# Altium PCB StepperMotorDriver.PcbDoc
Units mil, origin at the board's own origin, x right, y up, seen from the top; angles counter-clockwise.
Board outline 6000 x 4000 mil, 2 copper layers (Top Layer, Bottom Layer); 157 components, 124 nets, 514 pads, 4 vias.
Unrouted connection lines stored in the file: 335.
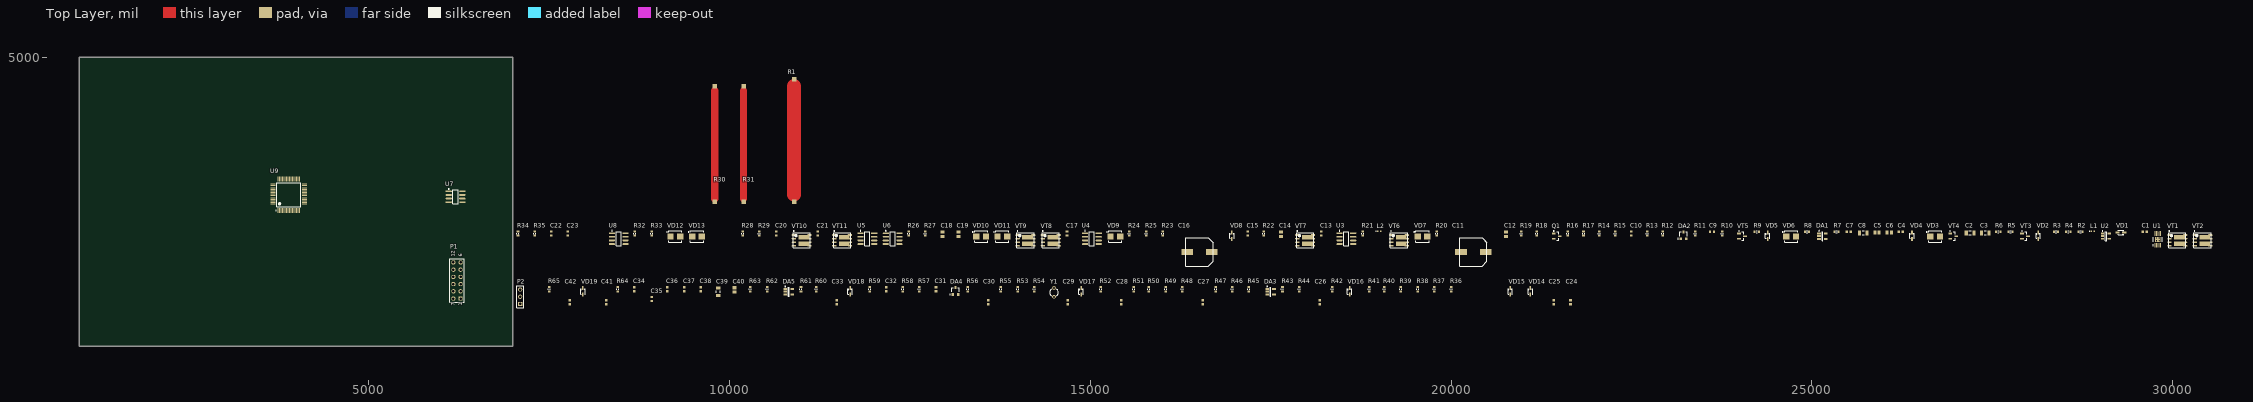
[diagram p0: Top Layer view]
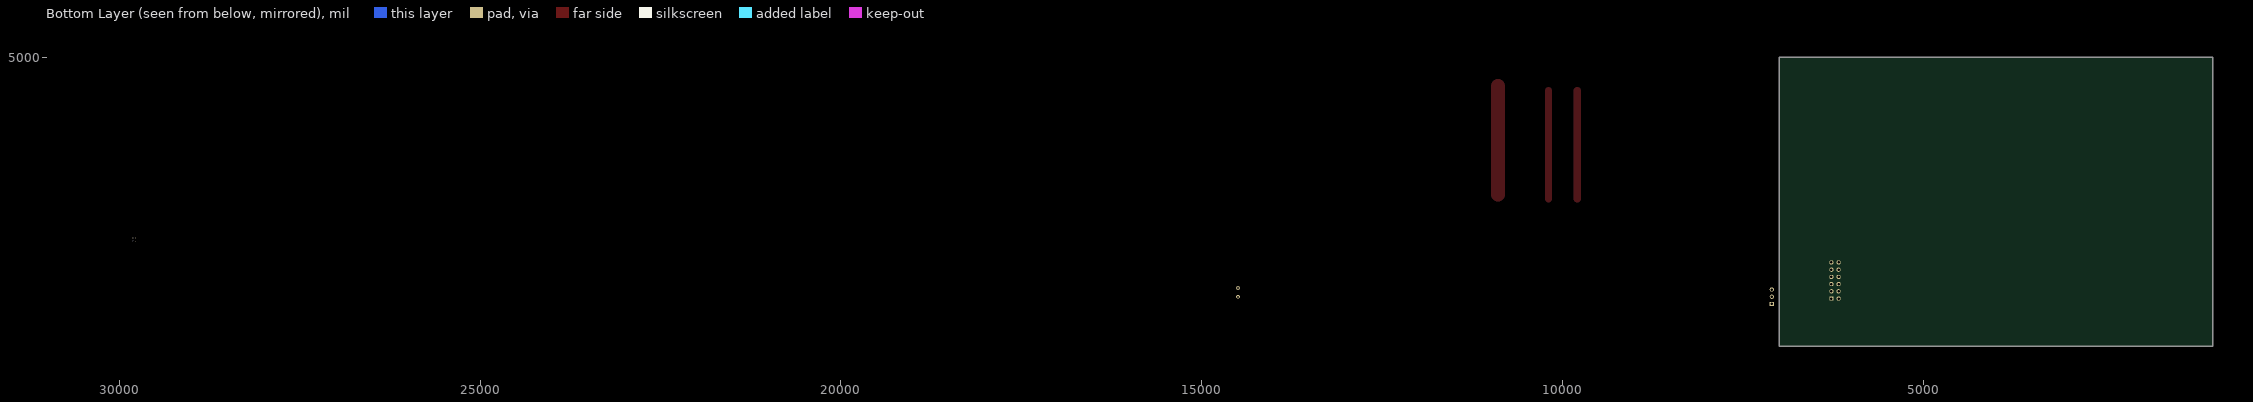
[diagram p1: Bottom Layer view, seen from below]

## Layer stack, top to bottom
Top Solder: solder mask 0.4, Solder Resist, Dk 3.5
Top Layer: signal copper 1.4
Dielectric 1: dielectric 12.6, FR-4, Dk 4.8
Bottom Layer: signal copper 1.4
Bottom Solder: solder mask 0.4, Solder Resist, Dk 3.5

## Board outline
1000,1000 7000,1000 7000,5000 1000,5000

## Design rules (kind name [scope] priority, off if disabled: settings)
Clearance [All] p1: gap=10
PolygonConnect [All] p1: connectstyle=Relief reliefconductorwidth=10 reliefentries=4 polygonreliefangle="90 Angle" airgapwidth=10
RoutingVias [All] p1: holewidth=28 width=50 viastyle="Through Hole" minholewidth=28 minwidth=50 maxholewidth=28 maxwidth=50
SolderMaskExpansion [All] p1: expansion=4
Width [All] p1: maxlimit=10 minlimit=10 preferedwidth=10
29 further rules are at their usual default settings.

## Classes and differential pairs
component class Designator: C1 C2 C3 C4 C5 C6 C7 C8 C9 C10 C11 C12 C13 C14 C15 C16 C17 C18 C19 C20 C21 C22 C23 DA1 DA2 L1 L2 Q1 R1 R2 R3 R4 R5 R6 R7 R8 R9 R10 R11 R12 R13 R14 R15 R16 R17 R18 R19 R20 R21 R22 R23 R24 R25 R26 R27 R28 R29 R30 R31 R32 R33 R34 R35 U1 U2 U3 U4 U5 U6 U7 U8 VD1 VD2 VD3 VD4 VD5 VD6 VD7 VD8 VD9 VD10 VD11 VD12 VD13 VT1 VT2 VT3 VT4 VT5 VT6 VT7 VT8 VT9 VT10 VT11

## Components (designator, comment, footprint, x,y, rotation, side; value= is the part's Value field where it differs from the comment)
C1 "Capacitor" 1608[0603] 29610,2585 r0 top
C2 "Capacitor" C1206 27190,2570 r0 top
C3 "Capacitor" C1206 27400,2570 r0 top
C4 "Capacitor" 1608[0603] 26230,2585 r0 top
C5 "Capacitor" C0805 25900,2575 r0 top
C6 "Capacitor" C0805 26070,2575 r0 top
C7 "Capacitor" 1608[0603] 25510,2585 r0 top
C8 "Capacitor" C1206 25710,2570 r0 top
C9 "Capacitor" 1608[0603] 23615,2585 r0 top
C10 "Capacitor" 1608[0603] 22495,2560 r90 top
C11 "47uF 63V" 10x10.5 20310,2305 r0 top
C12 "Capacitor" C0805 20760,2550 r90 top
C13 "Capacitor" 1608[0603] 18205,2560 r90 top
C14 "Capacitor" C0805 17645,2550 r90 top
C15 "Capacitor" 1608[0603] 17185,2560 r90 top
C16 "47uF 63V" 10x10.5 16515,2305 r0 top
C17 "Capacitor" 1608[0603] 14680,2560 r90 top
C18 "Capacitor" C0805 12955,2550 r90 top
C19 "Capacitor" C0805 13175,2550 r90 top
C20 "Capacitor" 1608[0603] 10650,2560 r90 top
C21 "Capacitor" 1608[0603] 11230,2560 r90 top
C22 "Capacitor" 1608[0603] 7535,2560 r90 top
C23 "Capacitor" 1608[0603] 7765,2560 r90 top
C24 "Capacitor" 1608[0603] 21655,1610 r90 top
C25 "Capacitor" 1608[0603] 21425,1610 r90 top
C26 "Capacitor" 1608[0603] 18180,1610 r90 top
C27 "Capacitor" 1608[0603] 16560,1610 r90 top
C28 "Capacitor" 1608[0603] 15430,1610 r90 top
C29 "Capacitor" 1608[0603] 14690,1610 r90 top
C30 "Capacitor" 1608[0603] 13590,1610 r90 top
C31 "Capacitor" 1608[0603] 12865,1790 r90 top
C32 "Capacitor" 1608[0603] 12175,1790 r90 top
C33 "Capacitor" 1608[0603] 11490,1610 r90 top
C34 "Capacitor" 1608[0603] 8685,1790 r90 top
C35 "Capacitor" 1608[0603] 8930,1655 r90 top
C36 "Capacitor" 1608[0603] 9145,1790 r90 top
C37 "Capacitor" 1608[0603] 9375,1790 r90 top
C38 "Capacitor" 1608[0603] 9605,1790 r90 top
C39 "Capacitor" C1206 9850,1755 r90 top
C40 "Capacitor" C0805 10075,1780 r90 top
C41 "Capacitor" 1608[0603] 8300,1610 r90 top
C42 "Capacitor" 1608[0603] 7790,1610 r90 top
DA1 "LMV611MF" MF05A_M 25145,2525 r0 top
DA2 "TLV809" SOT23 23220,2535 r0 top
DA3 "LMV611MF" MF05A_M 17500,1755 r0 top
DA4 "TLV809" SOT23 13135,1765 r0 top
DA5 "LMV611MF" MF05A_M 10825,1755 r0 top
L1 "Inductor" 0402-A 28890,2590 r0 top
L2 "Inductor" 0402-A 19005,2590 r0 top
P1 "Header 6X2A" HDR2X6_CEN 6280,1660 r90 top
P2 "Header 3" HDR1X3 7105,1585 r90 top
Q1 "2N7002" SOT23_N 21465,2525 r0 top
R1 "Resistor" Res12mOhm 10900,3200 r90 top
R2 "Resistor" J1-0603 28720,2585 r0 top
R3 "Resistor" J1-0603 28380,2585 r0 top
R4 "Resistor" J1-0603 28550,2585 r0 top
R5 "Resistor" J1-0603 27750,2585 r0 top
R6 "Resistor" J1-0603 27580,2585 r0 top
R7 "Resistor" J1-0603 25340,2585 r0 top
R8 "Resistor" J1-0603 24930,2585 r0 top
R9 "Resistor" J1-0603 24235,2585 r0 top
R10 "Resistor" J1-0603 23755,2560 r90 top
R11 "Resistor" J1-0603 23385,2560 r90 top
R12 "Resistor" J1-0603 22935,2560 r90 top
R13 "Resistor" J1-0603 22715,2560 r90 top
R14 "Resistor" J1-0603 22055,2560 r90 top
R15 "Resistor" J1-0603 22275,2560 r90 top
R16 "Resistor" J1-0603 21615,2560 r90 top
R17 "Resistor" J1-0603 21835,2560 r90 top
R18 "Resistor" J1-0603 21190,2560 r90 top
R19 "Resistor" J1-0603 20970,2560 r90 top
R20 "Resistor" J1-0603 19800,2560 r90 top
R21 "Resistor" J1-0603 18775,2560 r90 top
R22 "Resistor" J1-0603 17405,2560 r90 top
R23 "Resistor" J1-0603 16005,2560 r90 top
R24 "Resistor" J1-0603 15545,2560 r90 top
R25 "Resistor" J1-0603 15775,2560 r90 top
R26 "Resistor" J1-0603 12485,2560 r90 top
R27 "Resistor" J1-0603 12715,2560 r90 top
R28 "Resistor" J1-0603 10190,2560 r90 top
R29 "Resistor" J1-0603 10420,2560 r90 top
R30 "Resistor" Res24mOhm 9800,3200 r90 top
R31 "Resistor" Res24mOhm 10200,3200 r90 top
R32 "Resistor" J1-0603 8695,2560 r90 top
R33 "Resistor" J1-0603 8925,2560 r90 top
R34 "Resistor" J1-0603 7075,2560 r90 top
R35 "Resistor" J1-0603 7305,2560 r90 top
R36 "Resistor" J1-0603 20000,1790 r90 top
R37 "Resistor" J1-0603 19770,1790 r90 top
R38 "Resistor" J1-0603 19540,1790 r90 top
R39 "Resistor" J1-0603 19305,1790 r90 top
R40 "Resistor" J1-0603 19075,1790 r90 top
R41 "Resistor" J1-0603 18865,1790 r90 top
R42 "Resistor" J1-0603 18355,1790 r90 top
R43 "Resistor" J1-0603 17665,1790 r90 top
R44 "Resistor" J1-0603 17895,1790 r90 top
R45 "Resistor" J1-0603 17200,1790 r90 top
R46 "Resistor" J1-0603 16970,1790 r90 top
R47 "Resistor" J1-0603 16740,1790 r90 top
R48 "Resistor" J1-0603 16275,1790 r90 top
R49 "Resistor" J1-0603 16045,1790 r90 top
R50 "Resistor" J1-0603 15815,1790 r90 top
R51 "Resistor" J1-0603 15605,1790 r90 top
R52 "Resistor" J1-0603 15145,1790 r90 top
R53 "Resistor" J1-0603 13995,1790 r90 top
R54 "Resistor" J1-0603 14225,1790 r90 top
R55 "Resistor" J1-0603 13765,1790 r90 top
R56 "Resistor" J1-0603 13305,1790 r90 top
R57 "Resistor" J1-0603 12635,1790 r90 top
R58 "Resistor" J1-0603 12405,1790 r90 top
R59 "Resistor" J1-0603 11945,1790 r90 top
R60 "Resistor" J1-0603 11205,1790 r90 top
R61 "Resistor" J1-0603 10995,1790 r90 top
R62 "Resistor" J1-0603 10525,1790 r90 top
R63 "Resistor" J1-0603 10295,1790 r90 top
R64 "Resistor" J1-0603 8455,1790 r90 top
R65 "Resistor" J1-0603 7505,1790 r90 top
U1 "LM25011MY" MUC10A_N 29790,2480 r90 top
U2 "LP2985AIM5-3.3" MF05A_N 29070,2525 r0 top
U3 "IR2101S" SO-8_N 18550,2490 r0 top
U4 "IR2101S" SO-8_N 15025,2490 r0 top
U5 "IR2101S" SO-8_N 11915,2490 r0 top
U6 "IR2101S" SO-8_N 12265,2490 r0 top
U7 "IR2101S" SO-8_N 6210,3070 r0 top
U8 "IR2101S" SO-8_N 8470,2490 r0 top
U9 "STM32F334" LQFP64_N 3900,3100 r90 top
VD1 "BZX384C4V7" SOD323 29280,2575 r0 top
VD2 "BZX384C4V7" SOD323 28135,2530 r90 top
VD3 "MBRS190" DIOM4336X24N 26705,2520 r0 top
VD4 "BZX384C4V7" SOD323 26385,2530 r90 top
VD5 "BZX384C4V7" SOD323 24385,2530 r90 top
VD6 "MBRS190" DIOM4336X24N 24710,2520 r0 top
VD7 "MBRS190" DIOM4336X24N 19605,2520 r0 top
VD8 "BZX384C4V7" SOD323 16965,2530 r90 top
VD9 "MBRS190" DIOM4336X24N 15350,2520 r0 top
VD10 "MBRS190" DIOM4336X24N 13490,2520 r0 top
VD11 "MBRS190" DIOM4336X24N 13785,2520 r0 top
VD12 "MBRS190" DIOM4336X24N 9255,2520 r0 top
VD13 "MBRS190" DIOM4336X24N 9555,2520 r0 top
VD14 "BZX384C4V7" SOD323 21100,1760 r90 top
VD15 "BZX384C4V7" SOD323 20820,1760 r90 top
VD16 "BZX384C4V7" SOD323 18595,1760 r90 top
VD17 "BZX384C4V7" SOD323 14875,1760 r90 top
VD18 "BZX384C4V7" SOD323 11675,1760 r90 top
VD19 "BZX384C4V7" SOD323 7975,1760 r90 top
VT1 "SI7469DP" PowerPak_SO-8 30060,2465 r0 top
VT2 "SI7469DP" PowerPak_SO-8 30410,2465 r0 top
VT3 "BC856" SOT23_N 27950,2525 r0 top
VT4 "BC856" SOT23_N 26955,2525 r0 top
VT5 "BC856" SOT23_N 24030,2525 r0 top
VT6 "Si7960DP" PowerPak_SO-8 19280,2465 r0 top
VT7 "Si7960DP" PowerPak_SO-8 17980,2465 r0 top
VT8 "Si7960DP" PowerPak_SO-8 14455,2465 r0 top
VT9 "Si7960DP" PowerPak_SO-8 14105,2465 r0 top
VT10 "Si7960DP" PowerPak_SO-8 11005,2465 r0 top
VT11 "Si7960DP" PowerPak_SO-8 11565,2465 r0 top
Y1 "XTAL" R38 14500,1745 r0 top

## Footprints (in the part's own frame and the unit in brackets; to place one, negate y for a bottom-side part, rotate by r counter-clockwise, add the part's x,y. Pads: shape width x height; smd on the part's side, far side on the other; paste and mask are expansions set on the pad)
10x10.5 [mm]
  rect 4.1x2 smd: 1(-4.35,0) 2(4.35,0)
  silkscreen extent -4.75,-5 4.77,5
0402-A [mm] "Chip Inductor, Body 1.0x0.5mm, IPC High Density"
  rect 0.6x0.5 smd: 1(-0.5,0) 2(0.5,0)
  silkscreen extent -1.1,-0.15 -1.1,0.15, body extent -0.55,-0.3 0.55,0.3, height 0.55
1608[0603] [mm] "Chip Capacitor, Body 1.6x0.8mm, IPC High Density"
  rect 0.8x0.9 smd: 1(-0.7,0) 2(0.7,0)
  body extent -0.87,-0.48 0.87,0.48, height 1.3
C0805 [mm] "Chip Capacitor, Body 2.0x1.3mm, IPC High Density"
  rect 1.1x1.4 smd: 1(-0.75,0) 2(0.75,0)
  body extent -1.1,-0.72 1.1,0.72, height 1.4
C1206 [mm] "Chip Capacitor, Body 3.2x1.6mm, IPC High Density"
  rect 1.1x1.7 smd: 1(-1.35,0) 2(1.35,0)
  silkscreen extent -0.4,-0.75 0.4,0.75, body extent -1.7,-0.9 1.7,0.9, height 1.3
DIOM4336X24N [mm] "Molded Diode, 2-Leads, Body 4,31x3,55mm, IPC Medium Density"
  rect 2.2x2.05 smd: 1(1.7,0) 2(-1.7,0)
  silkscreen extent -3.07,-1.95 2.3,1.95, body extent -2.28,-1.91 2.29,1.91, height 2.41
HDR1X3 [mm] "Connector; Header; 3 Position"
  rect 1.5x1.5 hole 0.9: 1(0,0)
  round 1.5 hole 0.9: 2(2.54,0) 3(5.08,0)
  silkscreen extent -1.27,-1.27 6.35,1.27
HDR2X6_CEN [mm] "Connector; Header; 6x2 Position"
  rect 1.5x1.5 hole 0.9: 1(0,0)
  round 1.5 hole 0.9: 2(2.54,0) 3(5.08,0) 4(7.62,0) 5(10.16,0) 6(12.7,0) 7(0,2.54) 8(2.54,2.54) 9(5.08,2.54) 10(7.62,2.54) 11(10.16,2.54) 12(12.7,2.54)
  silkscreen extent -1.27,-1.27 13.97,3.81
J1-0603 [mm] "Chip Resistor, Body 1.6x0.8mm, IPC High Density"
  rect 0.7x0.9 smd: 1(-0.75,0) 2(0.75,0)
  silkscreen extent -0.2,-0.35 0.2,0.35, body extent -0.85,-0.48 0.85,0.48, height 0.9
LQFP64_N [mm] "Thin QFP, 64-Leads, Body 10x10mm, Pitch 0.5mm, IPC Medium Density"
  oval 1.8x0.3 smd: 1(-5.55,3.75) 2(-5.55,3.25) 3(-5.55,2.75) 4(-5.55,2.25) 5(-5.55,1.75) 6(-5.55,1.25) 7(-5.55,0.75) 8(-5.55,0.25) 9(-5.55,-0.25) 10(-5.55,-0.75) 11(-5.55,-1.25) 12(-5.55,-1.75) 13(-5.55,-2.25) 14(-5.55,-2.75) 15(-5.55,-3.25) 16(-5.55,-3.75) 33(5.55,-3.75) 34(5.55,-3.25) 35(5.55,-2.75) 36(5.55,-2.25) 37(5.55,-1.75) 38(5.55,-1.25) 39(5.55,-0.75) 40(5.55,-0.25) 41(5.55,0.25) 42(5.55,0.75) 43(5.55,1.25) 44(5.55,1.75) 45(5.55,2.25) 46(5.55,2.75) 47(5.55,3.25) 48(5.55,3.75)
  oval 0.3x1.8 smd: 17(-3.75,-5.55) 18(-3.25,-5.55) 19(-2.75,-5.55) 20(-2.25,-5.55) 21(-1.75,-5.55) 22(-1.25,-5.55) 23(-0.75,-5.55) 24(-0.25,-5.55) 25(0.25,-5.55) 26(0.75,-5.55) 27(1.25,-5.55) 28(1.75,-5.55) 29(2.25,-5.55) 30(2.75,-5.55) 31(3.25,-5.55) 32(3.75,-5.55) 49(3.75,5.55) 50(3.25,5.55) 51(2.75,5.55) 52(2.25,5.55) 53(1.75,5.55) 54(1.25,5.55) 55(0.75,5.55) 56(0.25,5.55) 57(-0.25,5.55) 58(-0.75,5.55) 59(-1.25,5.55) 60(-1.75,5.55) 61(-2.25,5.55) 62(-2.75,5.55) 63(-3.25,5.55) 64(-3.75,5.55)
  silkscreen extent -5.67,-4.25 4.25,4.57, body extent -5,-5 5,5, height 1.6
MF05A_M [mm] "SOT23, 5-Leads, Body 2.9x1.6mm, Pitch 0.95mm, Lead Span 2.8mm, IPC Low Density"
  rect 1.3x0.7 smd: 1(-1.2,0.95) 2(-1.2,0) 3(-1.2,-0.95) 4(1.2,-0.95) 5(1.2,0.95)
  silkscreen extent -1.32,-1.55 0.15,1.97, body extent -0.9,-1.55 0.9,1.55, height 1.19
MF05A_N [mm] "SOT23, 5-Leads, Body 2.9x1.6mm, Pitch 0.95mm, Lead Span 2.8mm, IPC Medium Density"
  rect 1.1x0.65 smd: 1(-1.2,0.95) 2(-1.2,0) 3(-1.2,-0.95) 4(1.2,-0.95) 5(1.2,0.95)
  silkscreen extent -1.32,-1.55 0.25,1.95, body extent -0.9,-1.55 0.9,1.55, height 1.19
MUC10A_N [mm] "TSSOP, 10-Leads, Body 3x3mm, Pitch 0.5mm, Exposed Pad, IPC Medium Density"
  oval 1.7x0.3 smd: 1(-2.05,1) 2(-2.05,0.5) 3(-2.05,0) 4(-2.05,-0.5) 5(-2.05,-1) 6(2.05,-1) 7(2.05,-0.5) 8(2.05,0) 9(2.05,0.5) 10(2.05,1)
  rect 1.73x1.9 smd: 11(0,0)
  silkscreen extent -2.17,-1.55 0.8,1.82, body extent -1.55,-1.55 1.55,1.55, height 1.1
PowerPak_SO-8 [mm] "SOIC, 8-Leads, Body 5,15x5,89mm, Pitch 1,27mm, Thermal Pad 1,00.2x1,00.2mm, IPC Medium Density"
  oval 1.55x0.6 smd: 1(-2.75,1.905) 2(-2.75,0.635) 3(-2.75,-0.635) 4(-2.75,-1.905) 5(2.75,-1.905) 6(2.75,-0.635) 7(2.75,0.635) 8(2.75,1.905)
  rect 3.81x1.65 smd: 6(0.758,-1.16) 8(0.758,1.16)
  silkscreen extent -3.03,-2.65 3,3.45, body extent -3,-2.65 3,2.65, height 1.12
R38 [mm] "Crystal, Thru-Hole; 2 Leads; Body 3.1 x 8.2 mm (Dia.xH)"
  round 1.3 hole 0.7: 1(0,1.55) 2(0,-1.55)
  silkscreen extent -1.55,-1.19 1.55,1.17
Res12mOhm [mil]
  rect 60x60 smd: 1(1500,0) 2(-200,0)
  Top Layer lines w196.85: -100,0 1400,0
Res24mOhm [mil]
  rect 60x60 smd: 1(1400,0) 2(-200,0)
  Top Layer lines w98.43: -160,0 1340,0
SO-8_N [mm] "SOIC, 8-Leads, Body 4.9x3.9mm, Pitch 1.27mm, IPC Medium Density"
  oval 2.2x0.6 smd: 1(-2.4,1.905) 2(-2.4,0.635) 3(-2.4,-0.635) 4(-2.4,-1.905) 5(2.4,-1.905) 6(2.4,-0.635) 7(2.4,0.635) 8(2.4,1.905)
  silkscreen extent -2.52,-2.5 0.9,2.88, body extent -1.95,-2.45 1.95,2.45, height 1.75
SOD323 [mm] "SOD-323/SC-76; 2 Leads; Body 1.7 x 1.3 mm, (LxW)"
  rect 1.45x0.55 smd: 1(1.175,0) 2(-1.175,0)
  silkscreen extent -0.95,-0.75 0.95,0.75
SOT23 [mm] "SOT-23; 3 Leads; Body 3.0 x 2.5 mm, inc. leads (LxW max)"
  rect 0.85x1 smd: 1(-0.95,-1.2) 2(0.95,-1.2) 3(0,1.2)
  silkscreen extent -2.05,-1.32 1.28,1.2
SOT23_N [mm] "SOT23, 3-Leads, Body 2.9x1.3mm, Pitch 0.95mm, Lead Span 2.3mm, IPC Medium Density"
  rect 1.3x0.6 smd: 1(-1.05,0.95) 2(-1.05,-0.95) 3(1.05,0)
  silkscreen extent -1.17,-1.5 0.7,1.92, body extent -0.7,-1.5 0.7,1.5, height 1.1

## Part data
C11 C16: library part "Cap Pol1", "Polarized Capacitor (Radial)"
DA1 DA3 DA5: "Low Power Single Op Amp, 5-pin SOT-23"
DA2 DA4: "SuperVisor TI"
P1: "Header, 6-Pin, Dual row"
P2: "Header, 3-Pin"
Q1: "N-channel Enhancement Mode Field-effect Transistor"
U1: "42V, 2A Constant On-Time Switching Regulator with Adjustable Current Limit, 10-pin eMSOP"
U2: "Micropower 150 mA Low-Noise Ultra Low-Dropout Regulator, 5-pin SOT-23"
U3 U4 U5 U6 U7 U8: "High and Low Side Driver"
U9: library part STM32F103RBT6, "STM32 ARM-based 32-bit MCU with 128 Kbytes Flash, 64-pin LQFP, Industrial Temperature"
VD1 VD2 VD4 VD5 VD8 VD14 VD15 VD16 VD17 VD18 VD19: library part BZX384C5V6, "Zenner Diode"
VD3 VD6 VD7 VD9 VD10 VD11 VD12 VD13: "Silicon Zener Diode"
VT1 VT2: "P-Channel 80V (D-S)  MOSFET"
VT3 VT4 VT5: "PNP General-purpose Transistor"
VT6 VT7 VT8 VT9 VT10 VT11: "Dual N-Channel 60V (D-S), 175'C  MOSFET"
Y1: "Crystal Oscillator"

## Via types
v1: diameter 15.75, hole 7.87, Top Layer to Bottom Layer, 4 vias

## Nets (pads, with @x,y where several pads share a name; then routed paths per layer and width w, separated by ;. In a path a pad name is that pad's centre, name@x,y a point inside that pad or via, vN(x,y) a via of type N, cw(c..) or ccw(c..) an arc to the next point about the centre after c; other vN are vias at no path point)
3.3V: C8.2 C31.2 C34.2 C35.2 C36.2 C37.2 DA3.5 DA4.3 DA5.5 P1.1 P1.7 R56.1 R61.2 U2.5 U9.1 U9.19 U9.32 U9.48 U9.64
10V: C2.2 C3.2 L1.2 R8.2 U2.1 U2.3 U3.1 U4.1 U5.1 U6.1 U7.1 U8.1 VD3.2 VD6.2 VD7.1 VD9.1 VD10.1 VD11.1 VD12.1 VD13.1
GND: C2.1 C3.1 C4.1 C5.1 C7.1 C8.1 C10.1 C11.2 C12.1 C14.1 C15.1 C16.2 C18.2 C19.2 C24.2 C25.2 C26.1 C27.2 C28.2 C29.1 C30.2 C31.1 C32.1 C33.1 C34.1 C35.1 C36.1 C37.1 C39.1 C41.2 C42.1 DA2.1 DA3.2 DA4.1 DA5.2 P1.6 P1.12 P2.3 Q1.2 R7.1 R13.1 R15.2 R16.1 R17.2 R19.1 R23.1 R30.1 R31.1 R43.1 R51.1 R53.1 R60.1 R64.1 R65.1 U1.5 U1.7 U1.11 U2.2 U3.4 U4.4 U5.4 U6.4 U7.4 U8.4 U9.12 U9.18 U9.31 U9.47 U9.63 VD8.2 VD14.2 VD15.2 VD16.2 VD17.2 VD18.2 VD19.2 VT7.1 VT7.3
  other v1: 29770.32,2460.32 29809.69,2460.32 29770.32,2499.68 29809.69,2499.68
NetC1_1: C1.1 L1.1 U1.9
NetC1_2: C1.2 U1.10
NetC4_2: C4.2 U1.4
NetC5_2: C5.2 C6.2 DA1.5 R1.1 R5.2 VD5.1
NetC6_1: C6.1 DA1.2 R14.1 VD5.2
NetC7_2: C7.2 U2.4
NetC9_1: C9.1 DA1.3 R5.1 VT5.2
NetC9_2: C9.2 DA1.1 R6.2
NetC10_2: C10.2 R16.2 R37.2 VT5.3
NetC13_1: C13.1 U3.8 VD7.2
NetC13_2: C13.2 L2.1 U3.6 VT6.1 VT7.5 VT7.6
NetC15_2: C15.2 R21.1 R23.2 R54.1 VD8.1
NetC17_1: C17.1 U4.8 VD9.2
NetC17_2: C17.2 L2.2 U4.6 VT6.3 VT7.7 VT7.8
NetC20_1: C20.1 U5.8 VD10.2
NetC20_2: C20.2 R47.2 U5.6 VT9.1 VT10.7 VT10.8
NetC21_1: C21.1 U6.8 VD11.2
NetC21_2: C21.2 R62.2 U6.6 VT9.3 VT11.7 VT11.8
NetC22_1: C22.1 U7.8 VD12.2
NetC22_2: C22.2 R50.2 U7.6 VT8.1 VT10.5 VT10.6
NetC23_1: C23.1 U8.8 VD13.2
NetC23_2: C23.2 R63.2 U8.6 VT8.3 VT11.5 VT11.6
NetC24_1: C24.1 R36.1 U9.14 VD14.1
NetC25_1: C25.1 R37.1 U9.20 U9.23 VD15.1
NetC26_2: C26.2 R43.2 R47.1 U9.16 VD16.1
NetC27_1: C27.1 U9.5 Y1.2
NetC28_1: C28.1 DA3.3 R39.2 R51.2
NetC29_2: C29.2 R50.1 R53.2 U9.17 VD17.1
NetC30_1: C30.1 U9.6 Y1.1
NetC32_2: C32.2 DA4.2 R56.2 R57.1
NetC33_2: C33.2 R60.2 R62.1 U9.25 VD18.1
NetC38_1: C38.1 C40.1
NetC38_2: C38.2 C39.2 C40.2 R61.1 U9.13
NetC41_1: C41.1 DA5.3 R59.2 R64.2
NetC42_2: C42.2 P1.2 R63.1 R65.2 U9.28 VD19.1
NetDA1_4: DA1.4 VT5.1
NetDA2_2: DA2.2 R12.1
NetDA2_3: DA2.3 R3.2 R9.1 R17.1
NetDA3_1: DA3.1 R30.2 VT10.1 VT10.3
NetDA3_4: DA3.4 R39.1 U9.15 U9.26
NetDA5_1: DA5.1 R31.2 VT11.1 VT11.3
NetDA5_4: DA5.4 R59.1 U9.11 U9.30
NetP1_3: P1.3 U9.60
NetP1_4: P1.4 P2.1 U9.24
NetP1_5: P1.5 P2.2 U9.59
NetP1_9: P1.9 U9.46
NetP1_10: P1.10 U9.49
NetP1_11: P1.11 R57.2 U9.7
NetQ1_1: Q1.1 R12.2
NetQ1_3: Q1.3 R10.2
NetR1_2: R1.2 R3.1 R4.1 R6.1 VD1.1 VD2.1 VT1.1 VT1.2 VT1.3 VT3.2 VT4.2
NetR2_2: R2.2 U1.2
NetR4_2: R4.2 R10.1 VD1.2 VT3.1 VT4.1
NetR7_2: R7.2 U1.8 VD3.1 VD6.1
NetR8_1: R8.1 R11.1
NetR9_2: R9.2 VT4.3
NetR11_2: R11.2 R18.2
NetR13_2: R13.2 VD4.2 VT1.4 VT2.4 VT3.3
NetR14_2: R14.2 R15.1
NetR18_1: R18.1 R19.2 U1.6
NetR20_1: R20.1 U3.7
NetR20_2: R20.2 VT6.2
NetR22_1: R22.1 U3.5
NetR22_2: R22.2 VT7.4
NetR24_1: R24.1 U4.5
NetR24_2: R24.2 VT7.2
NetR25_1: R25.1 U4.7
NetR25_2: R25.2 VT6.4
NetR26_1: R26.1 U5.7
NetR26_2: R26.2 VT9.2
NetR27_1: R27.1 U6.7
NetR27_2: R27.2 VT9.4
NetR28_1: R28.1 U5.5
NetR28_2: R28.2 VT10.2
NetR29_1: R29.1 U6.5
NetR29_2: R29.2 VT11.2
NetR32_1: R32.1 U7.7
NetR32_2: R32.2 VT8.2
NetR33_1: R33.1 U8.7
NetR33_2: R33.2 VT8.4
NetR34_1: R34.1 U7.5
NetR34_2: R34.2 VT10.4
NetR35_1: R35.1 U8.5
NetR35_2: R35.2 VT11.4
NetR38_1: R38.1 U4.3
NetR38_2: R38.2 U9.27
NetR40_1: R40.1 U9.41
NetR40_2: R40.2
NetR41_1: R41.1 U9.42
NetR41_2: R41.2
NetR42_1: R42.1 U9.43
NetR42_2: R42.2
NetR44_1: R44.1 U9.44
NetR44_2: R44.2
NetR45_1: R45.1
NetR45_2: R45.2 U9.33
NetR46_1: R46.1
NetR46_2: R46.2 U9.34
NetR48_1: R48.1
NetR48_2: R48.2 U9.35
NetR49_1: R49.1
NetR49_2: R49.2 U9.36
NetR52_1: R52.1 U3.2
NetR52_2: R52.2 U9.8
NetR54_2: R54.2 U9.9
NetR55_1: R55.1 U4.2
NetR55_2: R55.2 U9.10
NetR58_1: R58.1 U3.3
NetR58_2: R58.2 U9.2
NetU5_2: U5.2
NetU5_3: U5.3
NetU6_2: U6.2
NetU6_3: U6.3
NetU7_2: U7.2
NetU7_3: U7.3
NetU8_2: U8.2
NetU8_3: U8.3
NetVD2_2: VD2.2 VD4.1
NetVT1_5: VT1.5 VT1.6 VT1.7 VT1.8 VT2.5 VT2.6 VT2.7 VT2.8
VMAINBUS: C11.1 C12.2 R2.1 R36.2 U1.1 VT2.1 VT2.2 VT2.3 VT6.7 VT6.8
VSECONDARYBUS: C14.2 C16.1 C18.1 C19.1 R21.2 VT6.5 VT6.6 VT8.5 VT8.6 VT8.7 VT8.8 VT9.5 VT9.6 VT9.7 VT9.8
pads on no net: P1.8 U1.3 U9.3 U9.4 U9.21 U9.22 U9.29 U9.37 U9.38 U9.39 U9.40 U9.45 U9.50 U9.51 U9.52 U9.53 U9.54 U9.55 U9.56 U9.57 U9.58 U9.61 U9.62

## Text inside footprints (layer, text, board x,y; h text height)
P1: Top Overlay "7" at 6200,1560 h50 r90; Top Overlay "1" at 6300,1560 h50 r90; Top Overlay "6" at 6300,2240 h50 r90; Top Overlay "12" at 6200,2240 h50 r90